# Altium PCB PCB1.PcbDoc
Units mil, origin at the board's own origin, x right, y up, seen from the top; angles counter-clockwise.
Board outline 2665 x 3370 mil, 2 copper layers (Top Layer, Bottom Layer); 16 components, 15 nets, 74 pads, 0 vias.
Unrouted connection lines stored in the file: 28.
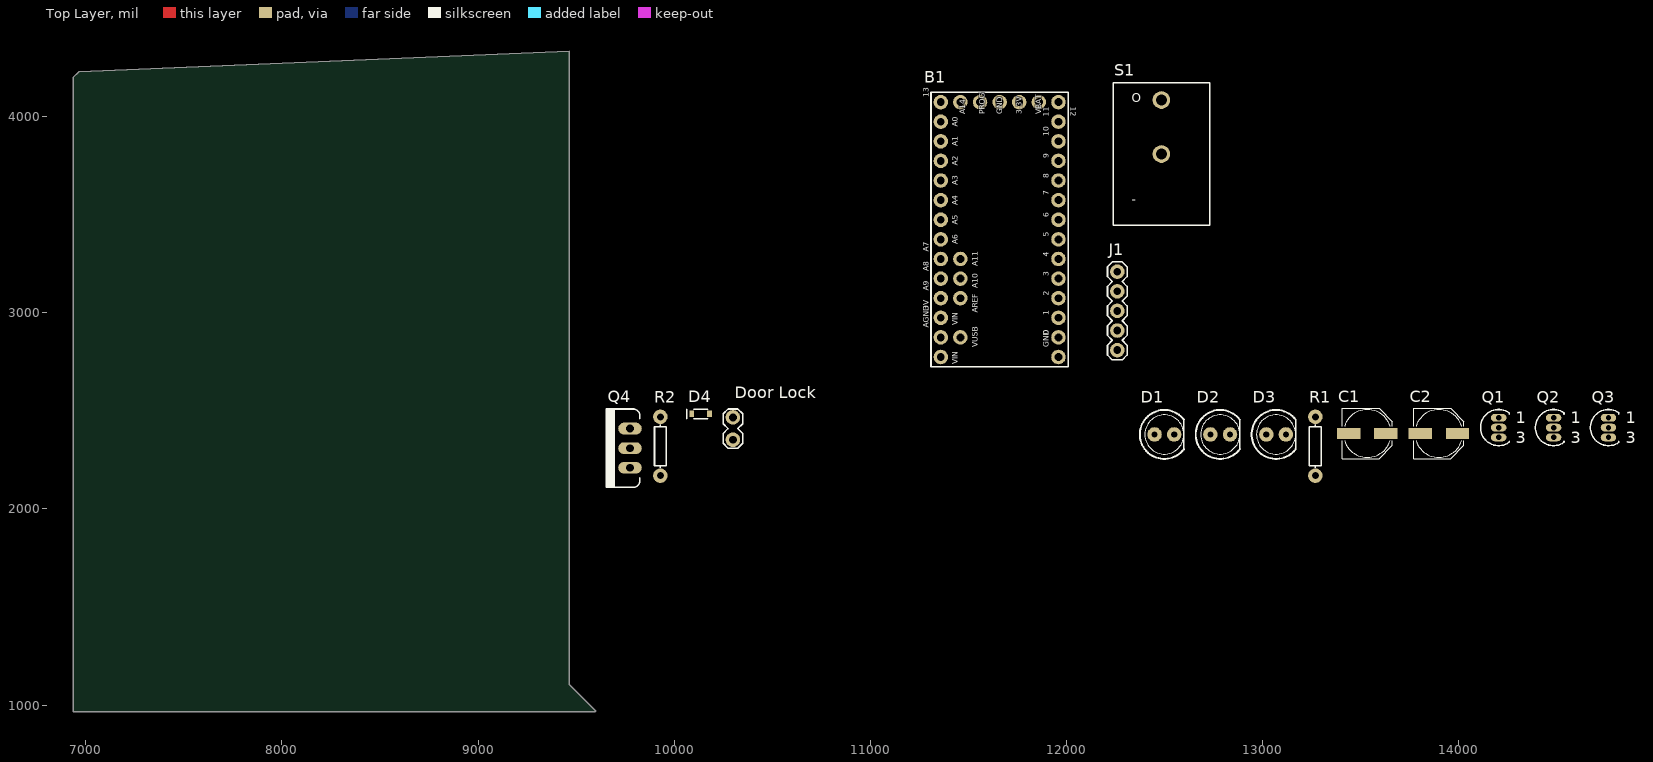
[diagram p0: Top Layer view]
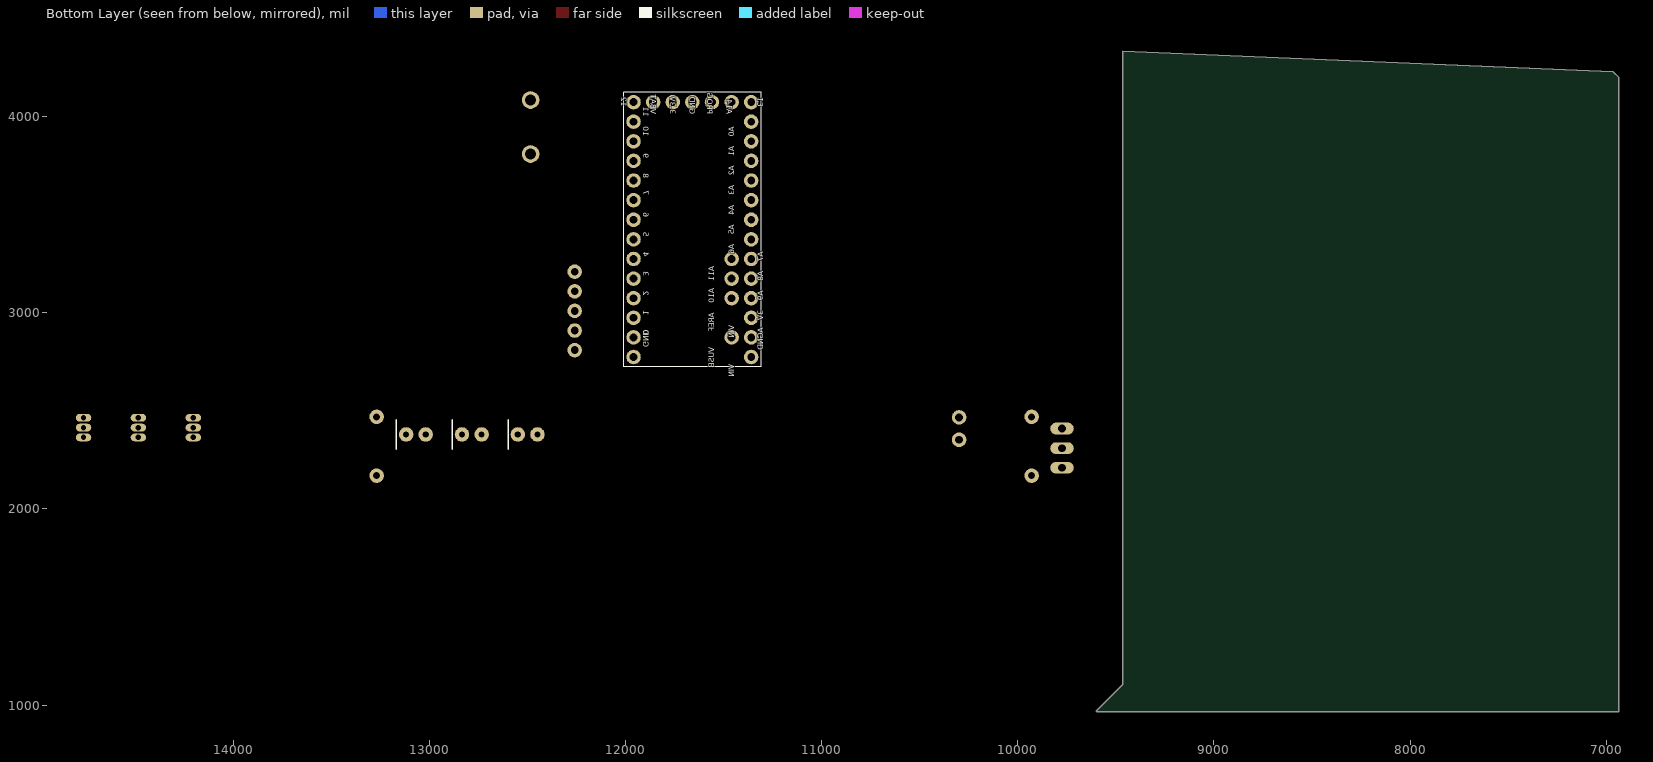
[diagram p1: Bottom Layer view, seen from below]

## Layer stack, top to bottom
Top Solder: solder mask 0.4, Solder Resist, Dk 3.5
Top Layer: signal copper 1.4
Dielectric 1: dielectric 12.6, FR-4, Dk 4.8
Bottom Layer: signal copper 1.4
Bottom Solder: solder mask 0.4, Solder Resist, Dk 3.5

## Board outline
6965,4230 6935,4200 6935,965 9595,965 9600,970 9465,1105 9465,4335

## Design rules (kind name [scope] priority, off if disabled: settings)
Clearance [All] p1: gap=10
PolygonConnect [All] p1: connectstyle=Relief reliefconductorwidth=10 reliefentries=4 polygonreliefangle="90 Angle" airgapwidth=10
RoomDefinition Sheet1 [InComponentClass('Sheet1')] p1: confinementstyle=ConfineIn formatcopy=TRUE lockcomponents=FALSE outline 7045,1060 9165,1060 9165,4130 7045,4130
RoutingVias [All] p1: holewidth=28 width=50 viastyle="Through Hole" minholewidth=28 minwidth=50 maxholewidth=28 maxwidth=50
SolderMaskExpansion [All] p1: expansion=4
Width [All] p1: maxlimit=10 minlimit=10 preferedwidth=10
30 further rules are at their usual default settings.

## Components (designator, comment, footprint, x,y, rotation, side; value= is the part's Value field where it differs from the comment)
B1 "Teensy LC" TEENSY-3.1 11660,3425 r0 top
C1 "0.47 uF" PANASONIC_D 13535,2385 r0 top
C2 "0.47 uF" PANASONIC_D 13900,2385 r0 top
D1 "#1" LED_5MM 12500,2380 r0 top
D2 "#2" LED_5MM 12785,2380 r0 top
D3 "#3" LED_5MM 13070,2380 r0 top
D4 "" SOD-323 10135,2485 r0 top
"Door Lock" "" 1X02_LOCK 10300,2360 r90 top
J1 "KY-040" 1X05 12260,2810 r90 top
Q1 "BS170" TO-92 14205,2415 r0 top
Q2 "BS170" TO-92 14485,2415 r0 top
Q3 "BS170" TO-92 14765,2415 r0 top
Q4 "IRF510" TO220V 9775,2310 r90 top
R1 "10 K" AXIAL-0.3 13270,2320 r90 top
R2 "10 K" AXIAL-0.3 9930,2320 r90 top
S1 "Force Unlock" SWITCH-SPST-VERTICAL 12485,3810 r0 top

## Footprints (in the part's own frame and the unit in brackets; to place one, negate y for a bottom-side part, rotate by r counter-clockwise, add the part's x,y. Pads: shape width x height; smd on the part's side, far side on the other; paste and mask are expansions set on the pad)
1X02_LOCK [mil]
  round 74 hole 40: 1(-7,0) 2(107,0)
  silkscreen extent -50,-50 150,50
1X05 [mil]
  round 74 hole 40: 1(0,0) 2(100,0) 3(200,0) 4(300,0) 5(400,0)
  silkscreen extent -50,-50 450,50
AXIAL-0.3 [mil]
  round 74 hole 35.43: P$1(-150,0) P$2(150,0)
  silkscreen extent -110,-30 110,30
LED_5MM [mil]
  round 74 hole 32: A(-50,0) K(50,0)
  silkscreen extent -125,-125 100,125
PANASONIC_D [mm]
  rect 3x1.4 smd: +(2.4,0) -(-2.4,0)
  silkscreen extent -3.25,-3.25 3.25,3.25
SOD-323 [mil]
  rect 24.8x32.68 smd: A(45.28,0) C(-45.28,0)
  silkscreen extent -70,-25 35,25
SWITCH-SPST-VERTICAL [mil]
  round 90 hole 55.12: 1(0,275.59) 2(0,0)
  silkscreen extent -246,-364 246,364
TEENSY-3.1 [mil]
  round 74 hole 40: 0(300,-550) 1(300,-450) 2(300,-350) 3(300,-250) 3.3V(100,650) 3V(-300,-450) 4(300,-150) 5(300,-50) 6(300,50) 7(300,150) 8(300,250) 9(300,350) 10(300,450) 11(300,550) 12(300,650) 13(-300,650) 14(-300,550) 15(-300,450) 16(-300,350) 17(-300,250) 18(-300,150) 19(-300,50) 20(-300,-50) 21(-300,-150) 22(-300,-250) 23(-300,-350) A10(-200,-250) A11(-200,-150) A14/DAC(-200,650) AGND(-300,-550) AREF(-200,-350) GND(0,650) GND1(300,-650) PROG(-100,650) VBAT(200,650) VIN(-300,-650) VUSB(-200,-550)
  silkscreen extent -350,-700 350,700
TO220V [mil]
  oval 60x120 hole 40: 1(-100,0) 2(0,0) 3(100,0)
  silkscreen extent -200,-50 200,120
TO-92 [mm] "TO, Flat Index; 3 In-Line, Axial Leads; Body Dia. 4.6mm; Leads 0.41 x 0.39 mm (max)"
  oval 2x1 hole 0.7: 1(0,1.27) 2(0,0) 3(0,-1.27)
  silkscreen extent -2.34,-2.34 1.35,2.34

## Part data
B1: library part TEENSY-3.1SILK
C1 C2: library part 47UF-POLAR-PANASONIC_D-50V-20%
D1 D2 D3: library part LED5MM
D4: library part DIODE-SCHOTTKY-BAT20J, "Schottky diode    A Schottky diode is a semiconductor diode which has a low forward voltage drop and a very fast switching action."
"Door Lock": library part CONN_02LOCK
J1: library part CONN_05, "Rotary Encoder"
Q1 Q2 Q3 Q4: library part MOSFET-NCH-FQP30N06L
R1 R2: library part 10KOHM-HORIZ-1/4W-5%
S1: library part SWITCH-SPST-2TV

## Nets (pads, with @x,y where several pads share a name; then routed paths per layer and width w, separated by ;. In a path a pad name is that pad's centre, name@x,y a point inside that pad or via, vN(x,y) a via of type N, cw(c..) or ccw(c..) an arc to the next point about the centre after c; other vN are vias at no path point)
"12V DC": "Door Lock.1" D4.C
CLK: B1.10 C1.+
DOOR_GATE: B1.8 Q4.1
DT: B1.11 C2.+
FORCE_UNLOCK: B1.9 R2.P$2 S1.2
GND: B1.GND B1.GND1 C1.- C2.- D1.K D2.K D3.K Q4.3 R2.P$1
HINT_1: B1.2 Q1.2
HINT_2: B1.3 Q2.2
HINT_3: B1.4 Q3.2
NetD1_A: D1.A Q1.3
NetD2_A: D2.A Q2.3
NetD3_A: D3.A Q3.3
NetD4_A: "Door Lock.2" D4.A Q4.2
SW: B1.7 R1.P$1
VCC: B1.3.3V Q1.1 Q2.1 Q3.1 R1.P$2 S1.1
pads on no net: B1.0 B1.1 B1.3V B1.5 B1.6 B1.12 B1.13 B1.14 B1.15 B1.16 B1.17 B1.18 B1.19 B1.20 B1.21 B1.22 B1.23 B1.A10 B1.A11 B1.A14/DAC B1.AGND B1.AREF B1.PROG B1.VBAT B1.VIN B1.VUSB J1.1 J1.2 J1.3 J1.4 J1.5

## Text inside footprints (layer, text, board x,y; h text height)
B1: Top Overlay "3V" at 11297.5,3012.5 h27.2 r90; Top Overlay "12" at 12022.5,4050 h27.2 r270; Top Overlay "13" at 11297.5,4100 h27.2 r90; Top Overlay "A7" at 11297.5,3312.5 h27.2 r90; Top Overlay "A14" at 11485,4012.5 h27.2 r90; Top Overlay "VBAT" at 11872.5,4012.5 h27.2 r90; Top Overlay "3.3V" at 11772.5,4012.5 h27.2 r90; Top Overlay "GND" at 11672.5,4012.5 h27.2 r90; Top Overlay "PROG" at 11585,4012.5 h27.2 r90; Top Overlay "AGND" at 11297.5,2925 h27.2 r90; Top Overlay "A9" at 11297.5,3112.5 h27.2 r90; Top Overlay "A8" at 11297.5,3212.5 h27.2 r90; Top Overlay "GND" at 11910,2825 h27.2 r90; Top Overlay "0" at 11910,2887.5 h27.2 r90; Top Overlay "1" at 11910,2987.5 h27.2 r90; Top Overlay "2" at 11910,3087.5 h27.2 r90; Top Overlay "3" at 11910,3187.5 h27.2 r90; Top Overlay "4" at 11910,3287.5 h27.2 r90; Top Overlay "5" at 11910,3387.5 h27.2 r90; Top Overlay "6" at 11910,3487.5 h27.2 r90; Top Overlay "7" at 11910,3600 h27.2 r90; Top Overlay "8" at 11910,3687.5 h27.2 r90; Top Overlay "9" at 11910,3787.5 h27.2 r90; Top Overlay "10" at 11910,3900 h27.2 r90; Top Overlay "11" at 11910,4000 h27.2 r90; Top Overlay "A0" at 11447.5,3950 h27.2 r90; Top Overlay "A1" at 11447.5,3850 h27.2 r90; Top Overlay "A2" at 11447.5,3750 h27.2 r90; Top Overlay "A3" at 11447.5,3650 h27.2 r90; Top Overlay "A4" at 11447.5,3550 h27.2 r90; Top Overlay "A5" at 11447.5,3450 h27.2 r90; Top Overlay "A6" at 11447.5,3350 h27.2 r90; Top Overlay "A11" at 11547.5,3237.5 h27.2 r90; Top Overlay "A10" at 11547.5,3125 h27.2 r90; Top Overlay "AREF" at 11547.5,3000 h27.2 r90; Top Overlay "VUSB" at 11547.5,2825 h27.2 r90; Top Overlay "VIN" at 11447.5,2937.5 h27.2 r90; Top Overlay "VIN" at 11447.5,2737.5 h27.2 r90; Bottom Overlay "A0" at 11447.5,3950 h27.2 r270; Bottom Overlay "11" at 11910,4000 h27.2 r90; Bottom Overlay "10" at 11910,3900 h27.2 r90; Bottom Overlay "9" at 11910,3787.5 h27.2 r90; Bottom Overlay "8" at 11910,3687.5 h27.2 r90; Bottom Overlay "7" at 11910,3600 h27.2 r90; Bottom Overlay "6" at 11910,3487.5 h27.2 r90; Bottom Overlay "5" at 11910,3387.5 h27.2 r90; Bottom Overlay "4" at 11910,3287.5 h27.2 r90; Bottom Overlay "3" at 11910,3187.5 h27.2 r90; Bottom Overlay "2" at 11910,3087.5 h27.2 r90; Bottom Overlay "1" at 11910,2987.5 h27.2 r90; Bottom Overlay "0" at 11910,2887.5 h27.2 r90; Bottom Overlay "GND" at 11910,2825 h27.2 r90; Bottom Overlay "12" at 12022.5,4050 h27.2 r90; Bottom Overlay "VBAT" at 11872.5,4012.5 h27.2 r90; Bottom Overlay "3.3V" at 11772.5,4012.5 h27.2 r90; Bottom Overlay "GND" at 11672.5,4012.5 h27.2 r90; Bottom Overlay "PROG" at 11585,4012.5 h27.2 r90; Bottom Overlay "A14" at 11485,4012.5 h27.2 r90; Bottom Overlay "A1" at 11447.5,3850 h27.2 r270; Bottom Overlay "A2" at 11447.5,3750 h27.2 r270; Bottom Overlay "A3" at 11447.5,3650 h27.2 r270; Bottom Overlay "A4" at 11447.5,3550 h27.2 r270; Bottom Overlay "A5" at 11447.5,3450 h27.2 r270; Bottom Overlay "A6" at 11447.5,3350 h27.2 r270; Bottom Overlay "A11" at 11547.5,3237.5 h27.2 r270; Bottom Overlay "A10" at 11547.5,3125 h27.2 r270; Bottom Overlay "AREF" at 11547.5,3000 h27.2 r270; Bottom Overlay "VIN" at 11447.5,2737.5 h27.2 r270; Bottom Overlay "VUSB" at 11547.5,2825 h27.2 r270; Bottom Overlay "VIN" at 11447.5,2937.5 h27.2 r270; Bottom Overlay "3V" at 11297.5,3012.5 h27.2 r270; Bottom Overlay "13" at 11297.5,4100 h27.2 r270; Bottom Overlay "A7" at 11297.5,3312.5 h27.2 r270; Bottom Overlay "AGND" at 11297.5,2925 h27.2 r270; Bottom Overlay "A9" at 11297.5,3112.5 h27.2 r270; Bottom Overlay "A8" at 11297.5,3212.5 h27.2 r270
Q1: Top Overlay "3" at 14292.56,2334.88 h59.05; Top Overlay "1" at 14292.56,2437.05 h59.05
Q2: Top Overlay "3" at 14572.56,2334.88 h59.05; Top Overlay "1" at 14572.56,2437.05 h59.05
Q3: Top Overlay "3" at 14852.56,2334.88 h59.05; Top Overlay "1" at 14852.56,2437.05 h59.05
S1: Top Overlay "O" at 12335,4060 h77.5; Top Overlay "-" at 12335,3540 h77.5; Mechanical 13 "EG2578" at 12335,3310 h77.5